# Altium PCB RPi Bowler PCB.PcbDoc
Units mil, origin at the board's own origin, x right, y up, seen from the top; angles counter-clockwise.
Board outline 1405 x 1875 mil, 2 copper layers (Top Layer, Bottom Layer); 23 components, 28 nets, 96 pads, 19 vias.
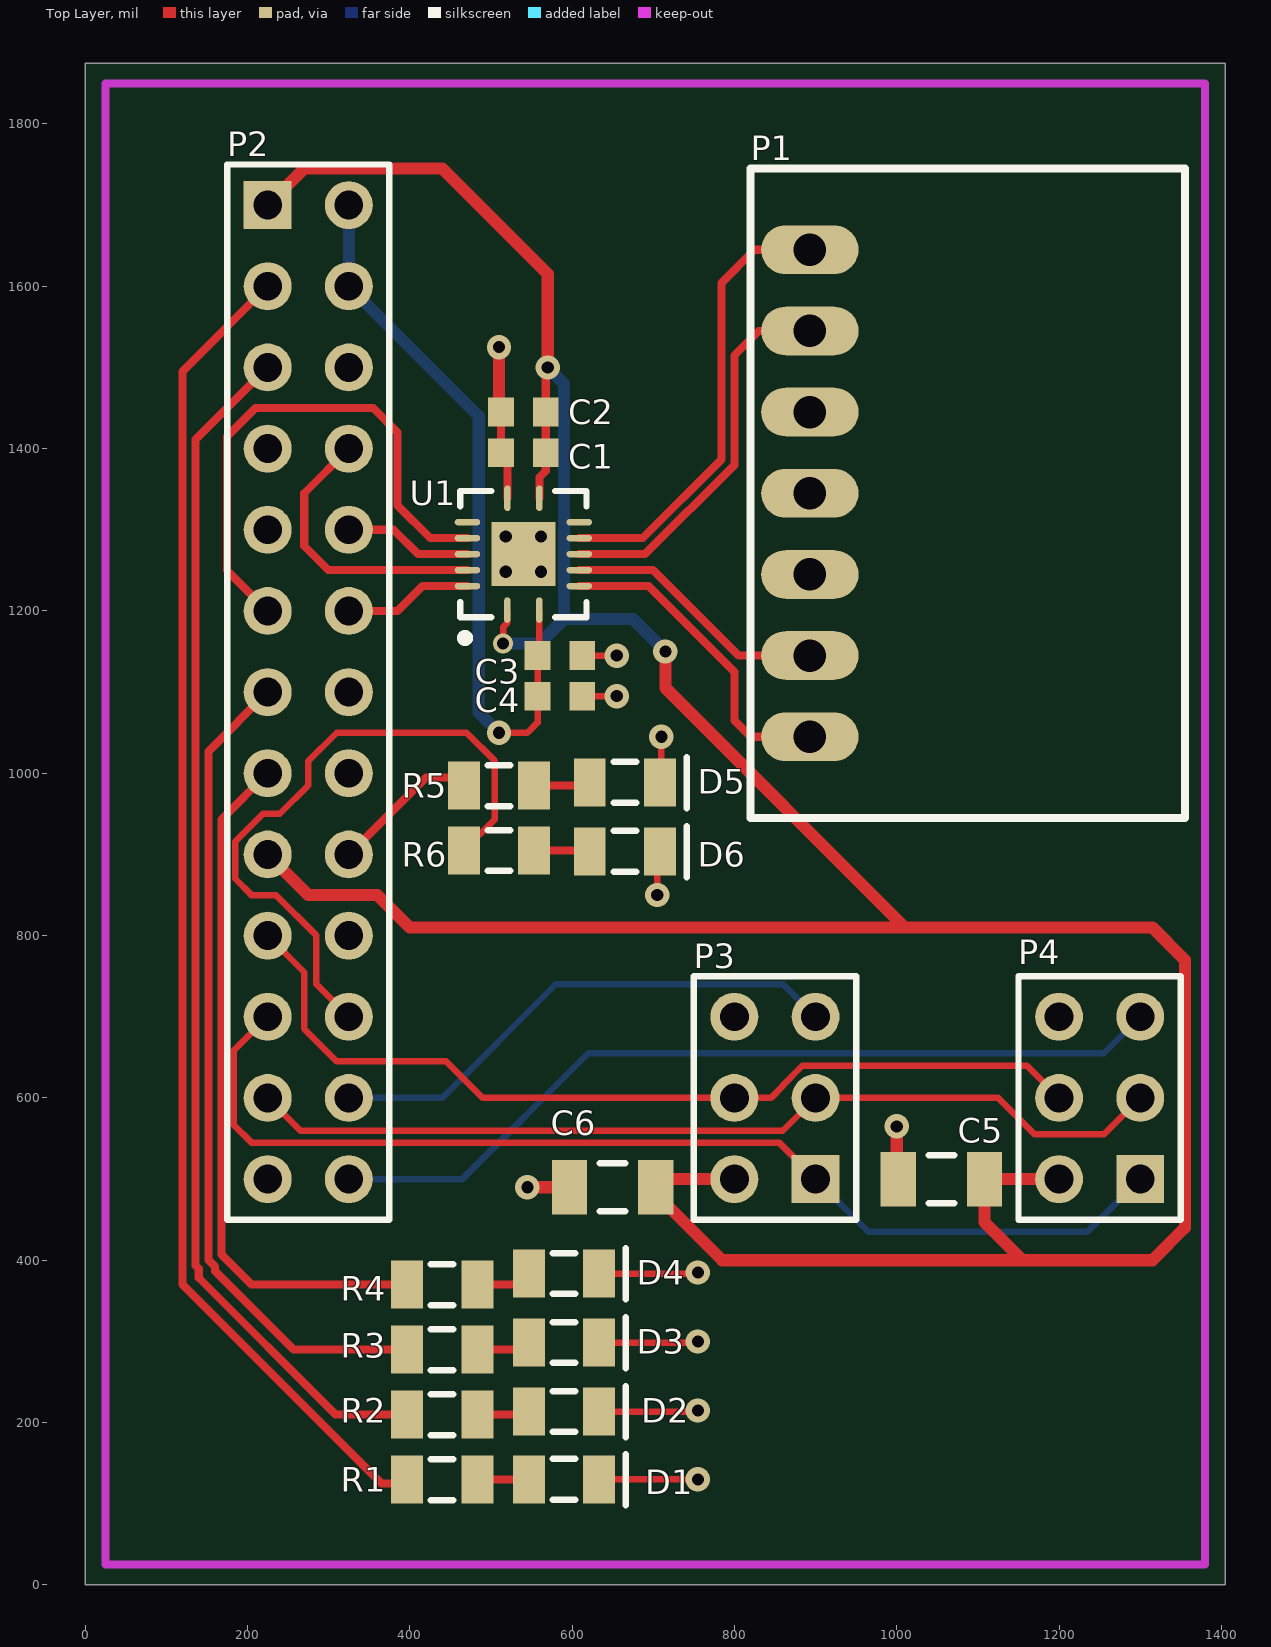
[diagram p0: Top Layer view]
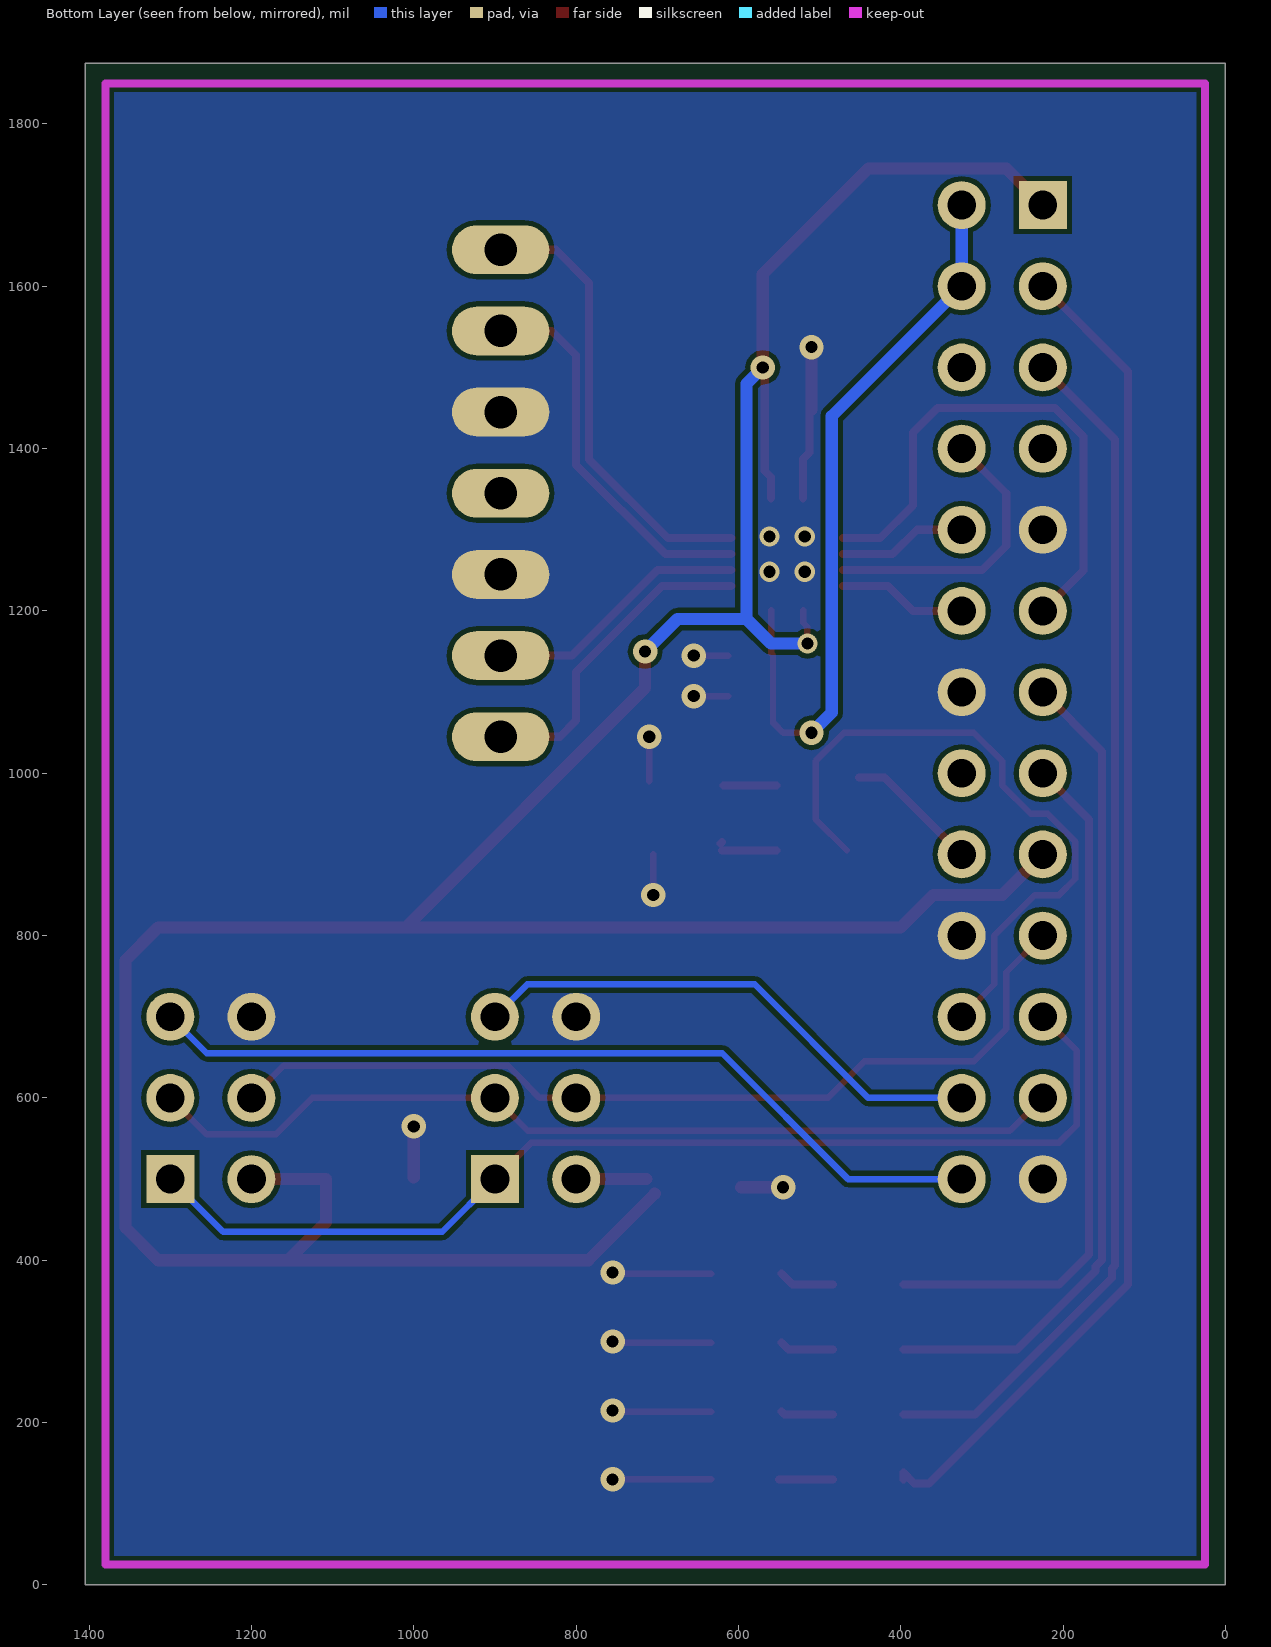
[diagram p1: Bottom Layer view, seen from below]

## Layer stack, top to bottom
Top Layer: signal copper 1.4
Dielectric: dielectric 12.6, FR-4, Dk 4.8
Bottom Layer: signal copper 1.4

## Board outline
0,0 0,1875 1405,1875 1405,0

## Design rules (kind name [scope] priority, off if disabled: settings)
Clearance [All] p1: gap=6
ComponentClearance [All] p1: gap=0 collisioncheckmode=3 verticalgap=10 showdistances=FALSE
FanoutControl Fanout_SOIC [(InComponent('U8') AND InComponent('U7'))] p3: bgadir=Out bgaviamode=Centered fanoutstyle=Staggered fanoutdirection=Alternating viagrid=1 // Fanout_SOIC (Default Rule)
FanoutControl Fanout_Small [All] p4: bgadir=Out bgaviamode=Centered fanoutstyle=Auto fanoutdirection=Alternating viagrid=1 // Fanout_Small (Default Rule)
HoleSize [All] p1: absolutevalues=TRUE maxlimit=120 minlimit=1 maxpercent=80.000 minpercent=20.000
MinimumSolderMaskSliver [All] p1 off: minsoldermaskwidth=10
PlaneConnect [All] p1: planeconnectstyle=Direct reliefexpansion=20 reliefentries=4 reliefconductorwidth=10 reliefairgap=10
PolygonConnect [All] p1: connectstyle=Direct reliefconductorwidth=10 reliefentries=4 polygonreliefangle="90 Angle" airgapwidth=10
RoutingVias [All] p1: holewidth=15 width=25 viastyle="Through Hole" minholewidth=15 minwidth=25 maxholewidth=28 maxwidth=50
SilkToSilkClearance [All] p1 off: silktosilkclearance=10
SilkToSolderMaskClearance SilkscreenOverComponentPads [IsPad] p1 off: minsilkscreentomaskgap=10 clearancetoexposedcopper=TRUE
SolderMaskExpansion [All] p1: expansion=4
Width [All] p1: maxlimit=30 minlimit=6 preferedwidth=6 minimp=50.000000 maximp=50.000000 favimp=50.000000
20 further rules are at their usual default settings.

## Components (designator, comment, footprint, x,y, rotation, side; value= is the part's Value field where it differs from the comment)
C1 "0603" 1608[0603] 540,1395 r0 top
C2 "0603" 1608[0603] 540,1445 r0 top
C3 "0603" 1608[0603] 585,1145 r180 top
C4 "0603" 1608[0603] 585,1095 r180 top
C5 "1206" C1206 1055,500 r0 top
C6 "1206" C1206 650,490 r0 top
D1 "LED3" "SM 0805 polarized" 670,86.5 r180 top
D2 "LED3" "SM 0805 polarized" 670,170 r180 top
D3 "LED3" "SM 0805 polarized" 670,255 r180 top
D4 "LED3" "SM 0805 polarized" 670,340 r180 top
D5 "LED3" "SM 0805 polarized" 745,945 r180 top
D6 "LED3" "SM 0805 polarized" 745,860 r180 top
P1 "BCS UART Molex - 0705430006" "BCS Serial Port - Molex" 820,945 r90 top
P2 "Header 13X2" HDR2X13 225,1700 r270 top
P3 "Header 3X2" HDR2X3 900,500 r90 top
P4 "Header 3X2" HDR2X3 1300,500 r90 top
R1 "0805" "SM 0805 - gap trimmed" 440,130 r0 top
R2 "0805" "SM 0805 - gap trimmed" 440,210 r0 top
R3 "0805" "SM 0805 - gap trimmed" 440,290 r0 top
R4 "0805" "SM 0805 - gap trimmed" 440,370 r0 top
R5 "0805" "SM 0805 - gap trimmed" 510,985 r0 top
R6 "0805" "SM 0805 - gap trimmed" 510,905 r0 top
U1 "TXS0104E Level Shifter" "RGY  (S-PVQFN-N14)" 540,1270 r90 top

## Footprints (in the part's own frame and the unit in brackets; to place one, negate y for a bottom-side part, rotate by r counter-clockwise, add the part's x,y. Pads: shape width x height; smd on the part's side, far side on the other; paste and mask are expansions set on the pad)
1608[0603] [mm] "Chip Capacitor, Body 1.6x0.8mm, IPC High Density"
  rect 0.8x0.9 smd: 1(-0.7,0) 2(0.7,0)
  body extent -0.87,-0.48 0.87,0.48, height 1.3
"BCS Serial Port - Molex" [mil] "Molex - 0705530041"
  oval 60x120 hole 40: 1(100,-73) 2(200,-73) 3(300,-73) 4(400,-73) 5(500,-73) 6(600,-73) 7(700,-73)
  silkscreen extent 0,-535 800,0, body extent 0,-535 800,3, height 177
C1206 [mm] "Chip Capacitor, Body 3.2x1.6mm, IPC High Density"
  rect 1.1x1.7 smd: 1(-1.35,0) 2(1.35,0)
  silkscreen extent -0.4,-0.75 0.4,0.75, body extent -1.7,-0.9 1.7,0.9, height 1.3
HDR2X3 [mm] "Connector; Header; 3x2 Position"
  rect 1.5x1.5 hole 0.9: 1(0,0)
  round 1.5 hole 0.9: 2(0,2.54) 3(2.54,0) 4(2.54,2.54) 5(5.08,0) 6(5.08,2.54)
  silkscreen extent -1.27,-1.27 6.35,3.81
HDR2X13 [mm] "Connector; Header; 13x2 Position"
  rect 1.5x1.5 hole 0.9: 1(0,0)
  round 1.5 hole 0.9: 2(0,2.54) 3(2.54,0) 4(2.54,2.54) 5(5.08,0) 6(5.08,2.54) 7(7.62,0) 8(7.62,2.54) 9(10.16,0) 10(10.16,2.54) 11(12.7,0) 12(12.7,2.54) 13(15.24,0) 14(15.24,2.54) 15(17.78,0) 16(17.78,2.54) 17(20.32,0) 18(20.32,2.54) 19(22.86,0) 20(22.86,2.54) 21(25.4,0) 22(25.4,2.54) 23(27.94,0) 24(27.94,2.54) 25(30.48,0) 26(30.48,2.54)
  silkscreen extent -1.27,-1.27 31.75,3.81
"RGY  (S-PVQFN-N14)" [mm] "QFN, 16-Leads, Body 3.50x3.50mm, Pitch 0.50mm, Thermal Pad 2.00x2.00mm, IPC Medium Density"
  oval 0.8x0.2 smd: 1(-1.75,0.5) 7(1.75,0.5) 8(1.75,-0.5) 14(-1.75,-0.5)
  oval 0.2x0.8 smd: 2(-1,1.75) 3(-0.5,1.75) 4(0,1.75) 5(0.5,1.75) 6(1,1.75) 9(1,-1.75) 10(0.5,-1.75) 11(0,-1.75) 12(-0.5,-1.75) 13(-1,-1.75)
  rect 2x2 smd: 15(0,0)
  silkscreen extent -2.75,-1.97 1.97,1.97, body extent -1.83,-1.83 1.83,1.83, height 1
"SM 0805 - gap trimmed" [mm]
  rect 1x1.5 smd: 1(-1.1,0) 2(1.1,0)
  silkscreen extent -0.36,-0.64 0.35,0.63
"SM 0805 polarized" [mm]
  rect 1x1.5 smd: 1(0.93,-1.105) 2(3.13,-1.105)
  silkscreen extent 0.1,-1.9 2.38,-0.3

## Part data
C1 C2 C3 C4 C5 C6: library part "Cap Semi", "Capacitor (Semiconductor SIM Model)"
D1 D2 D3 D4 D5 D6: "Typical BLUE SiC LED"
P1: library part "BCS Serial Port - Molex", "BCS UART Port Molex"
P2: "Header, 13-Pin, Dual row"
P3 P4: "Header, 3-Pin, Dual row"
R1 R2 R3 R4 R5 R6: library part Res3, "Resistor"
U1: library part TXS0104E, "TXS0104E - Bidriectional Opendrain/pushpull level shift"

## Via types
v1: diameter 30, hole 15, Top Layer to Bottom Layer, 14 vias
v2: diameter 25, hole 15, Top Layer to Bottom Layer, 5 vias

## Nets (pads, with @x,y where several pads share a name; then routed paths per layer and width w, separated by ;. In a path a pad name is that pad's centre, name@x,y a point inside that pad or via, vN(x,y) a via of type N, cw(c..) or ccw(c..) an arc to the next point about the centre after c; other vN are vias at no path point)
3.3VCC: C1.2 C2.2 C5.2 C6.2 P2.1 P2.17 P3.2 P4.2 U1.1 U1.8 | length 4264.9
  Top Layer w8: v2(515,1160) 515,1180 520.32,1185.32 U1.1
  Top Layer w10: U1.8 559.69,1364.69 567.56,1372.56 C1.2 C2.2 567.56,1497.56 v1(570,1500)
  Top Layer w15: P2.17 275,850 360,850 400,810 1010,810 ; P2.1 270,1745 440,1745 570,1615 v1(570,1500) ; C6.2@703.15,481.85 785,400 1155,400 ; C6.2@713.15,500 P3.2 ; v1(715,1150) 715,1105 1010,810 ; P4.2 C5.2 1108.15,446.85 1155,400 ; 1010,810 1315,810 1355,770 1355,440 1315,400 1155,400
  Bottom Layer w15: v2(515,1160) 560,1160 590,1190 ; v1(570,1500) 590,1480 590,1190 ; v1(715,1150) 675,1190 590,1190
5VCC: C3.2 C4.2 P2.2 P2.4 U1.14 | length 918.8
  Top Layer w8: v1(510,1050) 545,1050 557.44,1062.44 C4.2 C3.2 559.69,1147.24 U1.14
  Bottom Layer w15: P2.2 P2.4 485,1440 485,1075 v1(510,1050)
CS0: P2.24 P3.5 | length 649.6
  Bottom Layer w8: P2.24 440,600 580,740 860,740 P3.5
CS1: P2.26 P4.5 | length 1057.8
  Bottom Layer w8: P2.26 465,500 620,655 1255,655 P4.5
GND: C1.1 C2.1 C3.1 C4.1 C5.1 C6.1 D1.1 D2.1 D3.1 D4.1 D5.1 D6.1 P1.3 P1.5 P2.9 P2.14 P2.20 P2.25 P3.6 P4.6 U1.7 U1.15 | length 980.1
  Top Layer w8: C4.1 v1(655,1095) ; C3.1 v1(655,1145) ; D1.1 v1(755,130) ; D2.1 753.5,213.5 v1(755,215) ; D3.1 753.5,298.5 v1(755,300) ; D4.1 753.5,383.5 v1(755,385) ; v1(705,850) D6.1@705,900.12 ; D5.1@710,990.12 v1(710,1045)
  Top Layer w10: C2.1 C1.1 520.32,1387.13 U1.7
  Top Layer w15: C2.1@510,1447.44 v1(510,1525) ; v1(545,490) C6.1 ; C5.1@1000,501.85 v1(1000,565)
  other v2: 518.35,1248.35 561.65,1248.35 518.35,1291.65 561.65,1291.65
GPIO1_UART_CTS: P2.12 U1.2 | length 158.8
  Top Layer w10: P2.12 385,1200 415.63,1230.63 U1.2
GPIO4_UART_RTS: P2.11 U1.5 | length 665.4
  Top Layer w10: P2.11 175,1250 175,1415 210,1450 355,1450 385,1420 385,1330 425.31,1289.69 U1.5
MISO: P2.21 P3.1 P4.1 | length 1349
  Top Layer w8: P2.21 183,658 183,567 205,545 855,545 P3.1
  Bottom Layer w8: P3.1 965,435 1235,435 P4.1
MOSI: P2.19 P3.4 P4.4 | length 1132.1
  Top Layer w8: P2.19 270,755 270,685 310,645 445,645 490,600 P3.4 845,600 860.47,615.47 860.47,616.37 883.63,639.53 1160.47,639.53 P4.4
NetD1_2: D1.2 R1.2 | length 66.7
  Top Layer w10: R1.2 D1.2@550,130
NetD2_2: D2.2 R2.2 | length 64.9
  Top Layer w10: R2.2 543.27,210 D2.2
NetD3_2: D3.2 R3.2 | length 67
  Top Layer w10: R3.2 538.27,290 D3.2
NetD4_2: D4.2 R4.2 | length 69.1
  Top Layer w10: R4.2 533.27,370 D4.2
NetD5_2: D5.2 R5.2 | length 65
  Top Layer w10: R5.2 D5.2@618.27,985
NetD6_2: D6.2 R6.2 | length 69.1
  Top Layer w10: R6.2 D6.2@620.28,905 ; D6.2@620.28,915 D6.2@621.77,913.5
NetP1_1: P1.1 U1.13 | length 396.1
  Top Layer w10: U1.13 694.37,1230.63 800,1125 800,1065 820,1045 P1.1
NetP1_2: P1.2 U1.12 | length 327.7
  Top Layer w10: U1.12 699.68,1250.32 805,1145 P1.2
NetP1_6: P1.6 U1.11 | length 477.1
  Top Layer w10: U1.11 690,1270 800,1380 800,1515 830,1545 P1.6
NetP1_7: P1.7 U1.10 | length 558.6
  Top Layer w10: U1.10 687.06,1289.69 784,1386.63 784,1604 825,1645 P1.7
RX_LED: P2.22 R6.1 | length 824.9
  Top Layer w8: P2.22 285,740 285,800 235,850 205,850 185,870 185,915.9 219.1,950 240,950 275,985 275,1015 310,1050 470,1050 505,1015 505,943.31 R6.1
SCLK: P2.23 P3.3 P4.3 | length 1145.9
  Top Layer w8: P2.23 265.53,559.47 859.47,559.47 P3.3 1125,600 1170,555 1255,555 P4.3
TX_LED: P2.18 R5.1 | length 166
  Top Layer w10: P2.18 420,995 R5.1@451.69,995
UART_RX: P2.10 U1.4 | length 158.5
  Top Layer w10: P2.10 380,1300 410,1270 U1.4
UART_TX: P2.8 U1.3 | length 356.2
  Top Layer w10: P2.8 270,1345 270,1280 299.68,1250.32 U1.3
USER_LED0: P2.3 R1.1 | length 1665.4
  Top Layer w10: P2.3 120,1495 120,370.15 365.15,125 383.39,125 396.69,138.31 R1.1
USER_LED1: P2.5 R2.1 | length 1486.5
  Top Layer w10: P2.5 136,1411 136,393.75 140,389.75 140,378.43 308.43,210 R2.1
USER_LED2: P2.13 R3.1 | length 1023.6
  Top Layer w10: P2.13 152,1027 152,400.37 160,392.37 160,386.72 256.72,290 R3.1
USER_LED3: P2.15 R4.1 | length 860.6
  Top Layer w10: P2.15 168,943 168,407 205,370 R4.1
pads on no net: P1.4 P2.6 P2.7 P2.16 U1.6 U1.9

## Polygon pours and split planes (outlines as drawn)
GND on Bottom Layer "Mechanical 15-No Net" (solid, remove dead copper, pour order 3): 25,1850 25,25 1420,25 1420,1850

## Keep-outs
Keep-Out Layer:
  lines w10: 25,25 1380,25 1380,1850 25,1850 25,25

## Silkscreen, mask and mechanical layers (free items; w line width, h text height)
Mechanical 15:
  the board outline again, w10